# EAGLE board SensingREV2 (EAGLE 9.3.0)
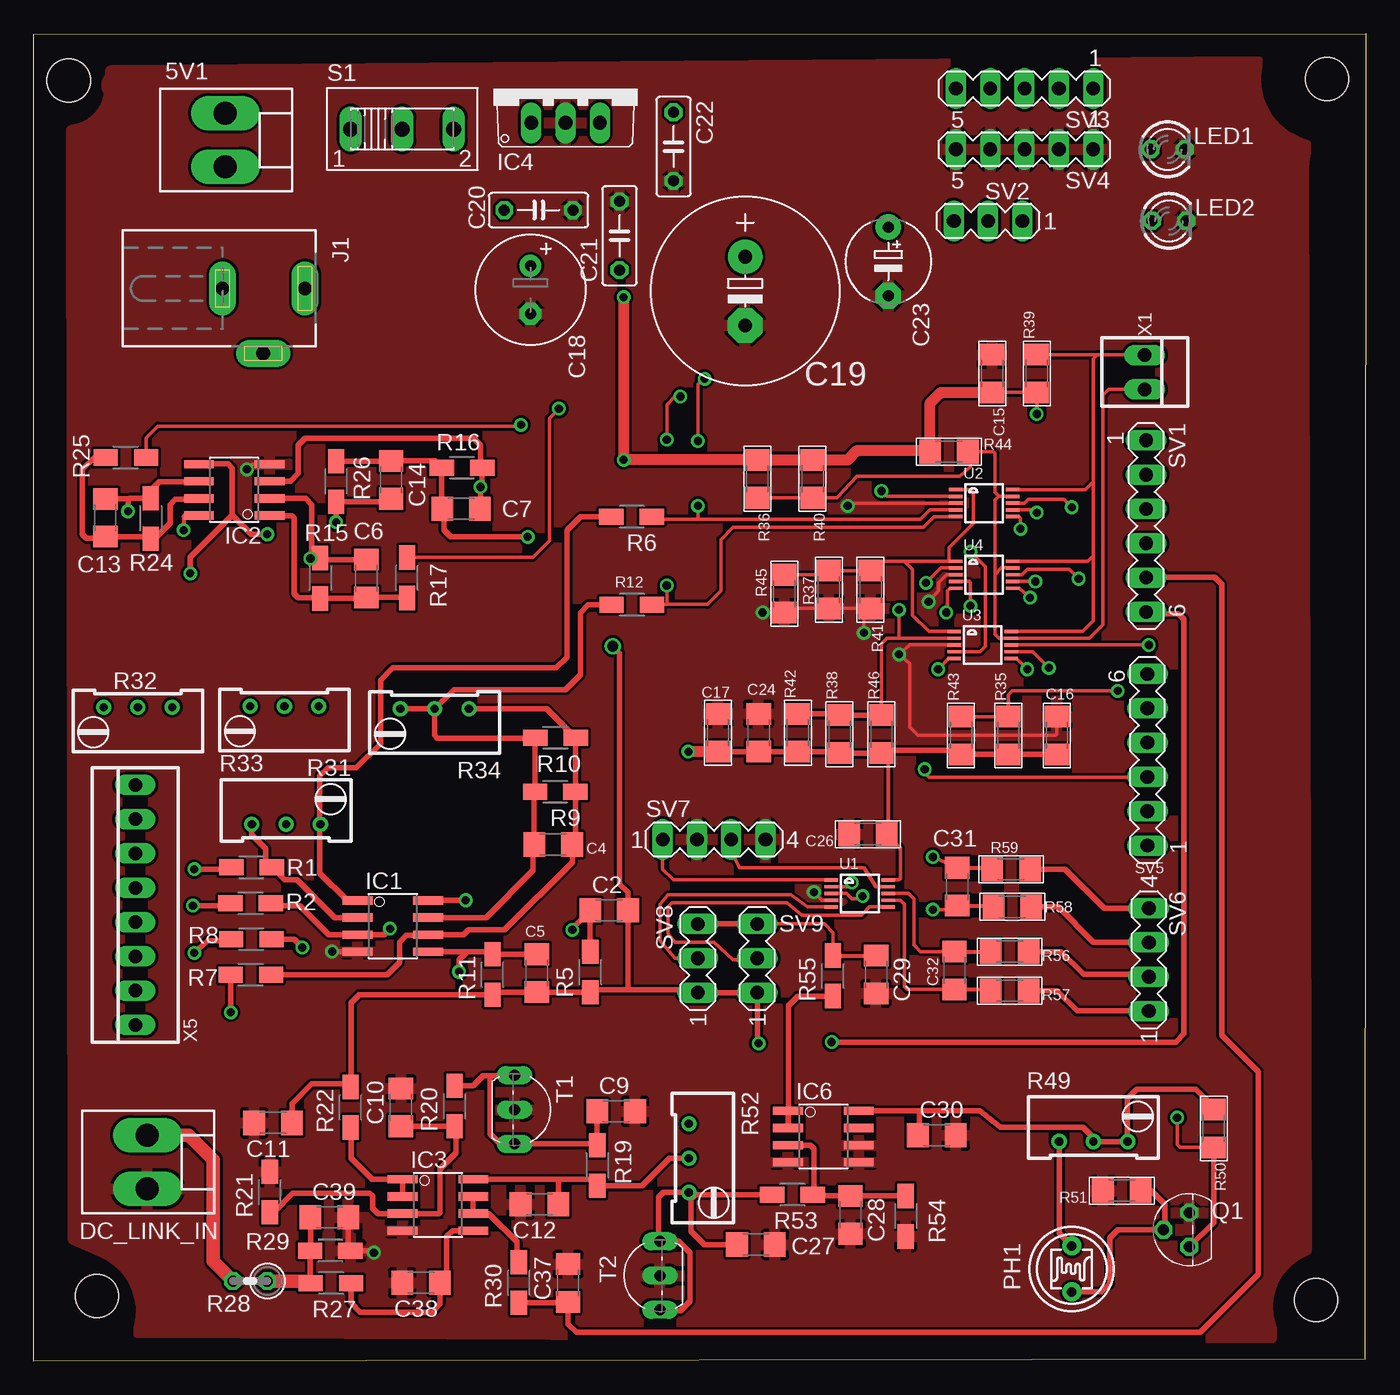
[diagram p0: board, top side]
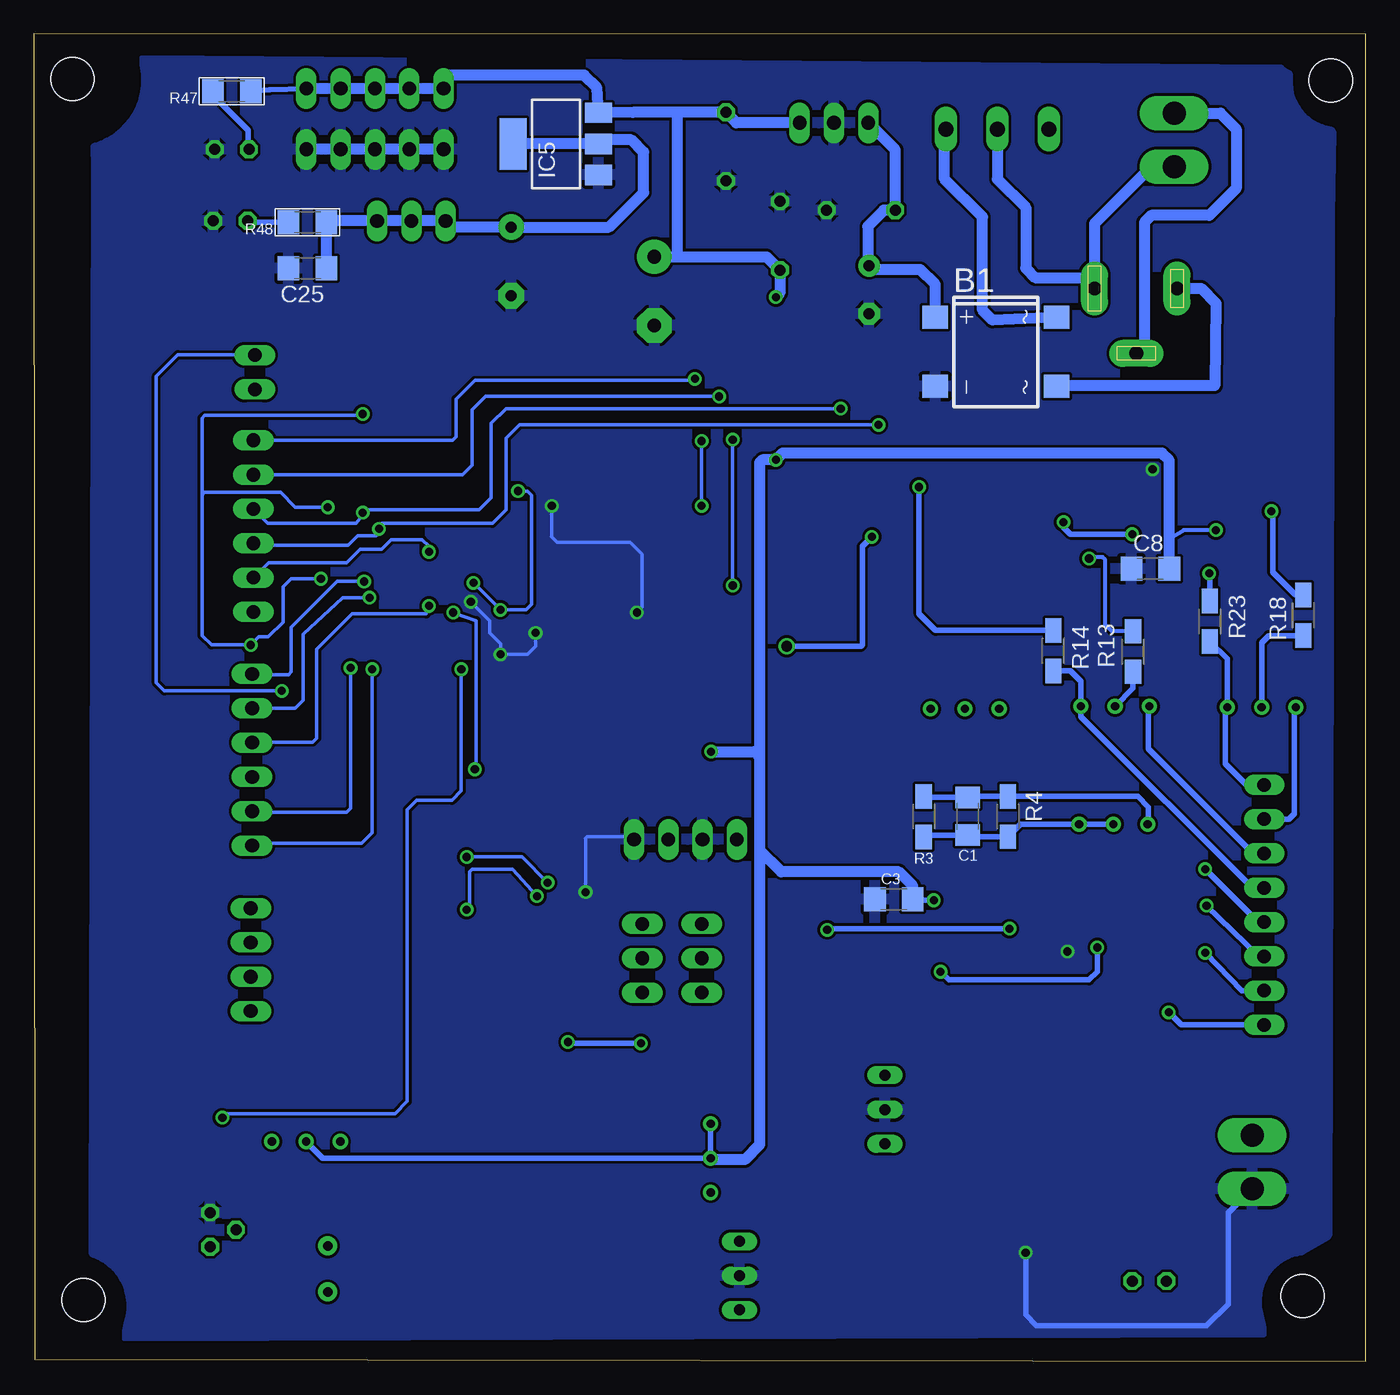
[diagram p1: board, bottom side, seen from below]

Size 98.66 x 98.29 mm. Coordinates in mm from the lower left corner, seen from the top.
Outline: 98.57,0.15 0.01,0 0,98.24 98.66,98.29 98.57,0.15
Copper layers (1*16): Top 0.025mm / dielectric 0.5mm / Bottom 0.025mm
Design rules "default *": minimum track width 8mil, minimum drill 15mil, track to track 8mil, track to pad 8mil, pad to pad 8mil, via to via 8mil, smd to smd 8mil, copper to edge 10mil, drill to drill 10mil, minimum pad ring 10mil, minimum via ring 8mil, stop-mask expansion 4mil, vias tented up to drill 0mil, thermal gap 10mil
Holes 3.2 mm at 2.59,94.83 94.99,4.53 95.79,94.93 4.69,4.83

## Footprints (pad centres in the part's own frame; a part is rotated, then mirrored left to right if it is on the bottom)
KK-156-2 = drill 1.7 pad 2.184 long: 1 -1.98,0; 2 1.98,0
DBS = smd 1.7 x 1.9: + -2.55,-4.5; - 2.55,-4.5; AC1 -2.55,4.5; AC2 2.55,4.5
C1206 = smd 1.6 x 1.8: 1 -1.4,0; 2 1.4,0
1206 = smd 1.6 x 1.8: 1 -1.4,0; 2 1.4,0
E3,5-8 = drill 0.813 pad 1.6: + -1.778,0 | drill 0.813 pad 1.6 octagon: - 1.778,0
E5-13 = drill 1.016 pad 2.54: + -2.54,0 | drill 1.016 pad 2.54 octagon: - 2.54,0
C050-025X075 = drill 0.813 octagon: 1 -2.54,0; 2 2.54,0
E5-6 = drill 0.813 pad 1.905: + -2.54,0 | drill 0.813 pad 1.905 octagon: - 2.54,0
SO08 = smd 0.61 x 2.21: 1 -1.905,-2.616; 2 -0.635,-2.616; 3 0.635,-2.616; 4 1.905,-2.616; 5 1.905,2.616; 6 0.635,2.616; 7 -0.635,2.616; 8 -1.905,2.616
TO220V = drill 1.016 long: 1 -2.54,-2.54; 2 0,-2.54; 3 2.54,-2.54
SOT-223 = smd 1.5 x 2: 1 -2.3,-3.15; 2 0,-3.15; 3 2.3,-3.15 | smd 3.8 x 2: 4 0,3.15
DCJ0202 = drill 1 pad 2 long: 1 0,3.1; 2 4.8,0; 3 0,-3
LED3MM = drill 0.813 octagon: A -1.27,0; K 1.27,0
T0-46-A10XX = drill 0.7 pad 1.4: 1 -1.7,0; 2 1.7,0
TO92 = drill 0.813 octagon: 1 1.27,0; 2 0,1.905; 3 -1.27,0
R1206W = smd 1.8 x 1.2: 1 -1.499,0; 2 1.499,0
0207/2V = drill 0.813 octagon: 1 -1.27,0; 2 1.27,0
RTRIM64W = drill 0.61: 1 1.27,-2.54; 2 1.27,0; 3 1.27,2.54
255SB = drill 1.118 long: 1 -3.81,0; 2 0,0; 3 3.81,0
MA06-1 = drill 1.016 long: 1 -6.35,0; 2 -3.81,0; 3 -1.27,0; 4 1.27,0; 5 3.81,0; 6 6.35,0
MA03-1 = drill 1.016 long: 1 -2.54,0; 2 0,0; 3 2.54,0
MA05-1 = drill 1.016 long: 1 -5.08,0; 2 -2.54,0; 3 0,0; 4 2.54,0; 5 5.08,0
MA04-1 = drill 1.016 long: 1 -3.81,0; 2 -1.27,0; 3 1.27,0; 4 3.81,0
TO92-ECB = drill 0.813 long: B 2.54,0; C 0,0; E -2.54,0
MSOP10 = smd 0.25 x 1: 1 -1,-2.113; 2 -0.5,-2.113; 3 0,-2.113; 4 0.5,-2.113; 5 1,-2.113; 6 1,2.113; 7 0.5,2.113; 8 0,2.113; 9 -0.5,2.113; 10 -1,2.113
22-23-2021 = drill 1 long: 1 -1.27,0; 2 1.27,0
22-23-2081 = drill 1 long: 1 -8.89,0; 2 -6.35,0; 3 -3.81,0; 4 -1.27,0; 5 1.27,0; 6 3.81,0; 7 6.35,0; 8 8.89,0

## Placement (x,y rotation side)
5V1  2PIN_RELIMATE  [KK-156-2]  14.19,90.43 270 top
B1  DBLS202G  [DBS]  27.39,74.73 270 bottom
C1  102  [C1206]  29.49,40.35 90 bottom
C2  102  [C1206]  42.62,33.38 0 top
C3  104  [C1206]  34.96,34.21 0 bottom
C4  102  [C1206]  38.47,38.26 0 top
C5  102  [C1206]  37.27,28.73 270 top
C6  102  [C1206]  24.64,57.96 270 top
C7  102  [C1206]  31.66,63.11 0 top
C8  104  [C1206]  15.95,58.68 0 bottom
C9  102  [C1206]  43.14,18.51 0 top
C10  102  [C1206]  27.19,18.8 90 top
C11  105  [C1206]  17.73,17.64 180 top
C12  104  [C1206]  37.46,11.62 180 top
C13  102  [C1206]  5.3,62.45 270 top
C14  102  [C1206]  26.47,65.25 270 top
C15  0.1µF  [1206]  70.99,73.13 270 top
C16  0.1uF  [1206]  75.79,46.33 270 top
C17  0.1µF  [1206]  50.69,46.53 270 top
C18  100uF/50V  [E3,5-8]  36.79,79.33 270 top
C19  1000uF/25V  [E5-13]  52.69,79.23 270 top
C20  0.1uF  [C050-025X075]  37.39,85.23 0 top
C21  0.1uF  [C050-025X075]  43.39,83.33 90 top
C22  0.1uF  [C050-025X075]  47.39,89.93 270 top
C23  22uf/25V Tantalum  [E5-6]  63.29,81.43 270 top
C24  0.1uF  [C1206]  53.69,46.53 90 top
C25  0.1uF  [C1206]  78.39,80.93 180 bottom
C26  0.1µF  [1206]  61.79,39.03 180 top
C27  102  [C1206]  53.49,8.63 0 top
C28  102  [C1206]  60.49,10.83 270 top
C29  105  [C1206]  62.39,28.63 270 top
C30  104  [C1206]  66.89,16.73 0 top
C31  102  [C1206]  68.39,35.13 270 top
C32  102  [C1206]  68.19,28.93 270 top
C37  105  [C1206]  39.58,5.79 90 top
C38  105  [C1206]  28.69,5.8 180 top
C39  105  [C1206]  21.9,10.65 0 top
DC_LINK_IN  2PIN_RELIMATE  [KK-156-2]  8.42,14.75 270 top
IC1  OPA2340U  [SO08]  26.6,32.21 270 top
IC2  OPA2340U  [SO08]  14.85,64.52 90 top
IC3  OPA2340U  [SO08]  29.94,11.56 270 top
IC4  7805TV  [TO220V]  39.39,94.23 0 top
IC5  AP1117  [SOT-223]  59.99,90.13 90 bottom
IC6  OPA2340U  [SO08]  58.49,16.63 270 top
J1  DCJ0202  [DCJ0202]  16.99,79.43 270 top
LED1  Red  [LED3MM]  83.99,89.73 0 top
LED2  Red  [LED3MM]  84.09,84.43 0 top
PH1  A1050_09  [T0-46-A10XX]  76.89,6.83 270 top
Q1  BC547  [TO92]  85.59,9.73 90 top
R1  1k  [R1206W]  16.13,36.57 0 top
R2  1k  [R1206W]  16.07,33.91 0 top
R3  20k  [R1206W]  32.74,40.32 270 bottom
R4  20k  [R1206W]  26.51,40.32 270 bottom
R5  10K  [R1206W]  41.22,28.82 90 top
R6  100E  [R1206W]  44.29,62.52 180 top
R7  1k  [R1206W]  16.09,28.62 0 top
R8  1k  [R1206W]  16.13,31.25 0 top
R9  20k  [R1206W]  38.63,42.15 180 top
R10  20k  [R1206W]  38.64,46.15 180 top
R11  10K  [R1206W]  33.98,28.63 90 top
R12  100E  [R1206W]  44.3,56.01 180 top
R13  1k  [R1206W]  17.23,52.55 90 bottom
R14  1k  [R1206W]  23.15,52.6 90 bottom
R15  1k  [R1206W]  21.22,57.97 270 top
R16  1k  [R1206W]  31.72,66.16 0 top
R17  1k  [R1206W]  27.65,58.01 90 top
R18  1k  [R1206W]  4.62,55.24 90 bottom
R19  510E  [R1206W]  41.74,14.49 270 top
R20  10k  [R1206W]  31.18,18.89 90 top
R21  22k  [R1206W]  17.49,12.53 90 top
R22  10E  [R1206W]  23.46,18.8 90 top
R23  1k  [R1206W]  11.54,54.78 90 bottom
R24  1k  [R1206W]  8.67,62.39 270 top
R25  1k  [R1206W]  6.83,66.91 0 top
R26  1k  [R1206W]  22.39,65.13 270 top
R27  10k  [R1206W]  22.01,5.77 180 top
R28  43K_1/2W  [0207/2V]  16.03,5.93 180 top
R29  1k  [R1206W]  21.96,8.18 180 top
R30  10E  [R1206W]  35.94,5.82 90 top
R31  100K  [RTRIM64W]  18.56,47.22 90 top
R32  100K  [RTRIM64W]  7.71,47.15 90 top
R33  100K  [RTRIM64W]  18.69,41.03 270 top
R34  100K  [RTRIM64W]  29.69,47.03 90 top
R35  10K  [1206]  72.19,46.33 90 top
R36  10K  [1206]  53.59,65.33 270 top
R37  10K  [1206]  58.89,57.13 270 top
R38  10K  [1206]  59.69,46.43 90 top
R39  10K  [1206]  74.29,73.13 90 top
R40  10K  [1206]  57.69,65.33 270 top
R41  10K  [1206]  61.99,57.13 270 top
R42  10K  [1206]  56.59,46.53 90 top
R43  10K  [1206]  68.69,46.33 90 top
R44  10K  [1206]  67.79,67.33 0 top
R45  10K  [1206]  55.59,56.83 270 top
R46  10K  [1206]  62.79,46.43 90 top
R47  390E  [1206]  83.99,94.03 180 bottom
R48  390E  [1206]  78.39,84.33 180 bottom
R49  100K  [RTRIM64W]  78.49,17.53 270 top
R50  1K  [1206]  87.39,17.23 270 top
R51  1K  [1206]  80.59,12.63 180 top
R52  100K  [RTRIM64W]  49.79,15.03 180 top
R53  10k  [R1206W]  56.19,12.33 180 top
R54  22k  [R1206W]  64.59,10.73 270 top
R55  10E  [R1206W]  59.19,28.53 90 top
R56  <10E  [1206]  72.29,30.33 180 top
R57  <10E  [1206]  72.29,27.43 180 top
R58  <10E  [1206]  72.49,33.63 180 top
R59  <10E  [1206]  72.39,36.43 180 top
S1  Slide_SW  [255SB]  27.29,91.23 0 top
SV1  Signal_TP  [MA06-1]  82.39,61.83 270 top
SV2  3.3V_PWR  [MA03-1]  70.69,84.43 180 top
SV3  5V_PWR  [MA05-1]  73.39,94.23 180 top
SV4  GND  [MA05-1]  73.39,89.73 180 top
SV5  ADC_IN  [MA06-1]  82.49,44.53 90 top
SV6  INA2181_IN  [MA04-1]  82.59,29.73 90 top
SV7  INA2181_OUT  [MA04-1]  50.39,38.63 0 top
SV8  REF_JMPR1  [MA03-1]  49.19,29.83 90 top
SV9  REF_JMPR2  [MA03-1]  53.59,29.83 90 top
T1  TL431  [TO92-ECB]  35.62,18.63 270 top
T2  TL431  [TO92-ECB]  46.39,6.33 90 top
U1  INA2181A2  [MSOP10]  61.19,34.63 270 top
U2  ADS1115IDGST  [MSOP10]  70.39,63.53 270 top
U3  ADS1115IDGST  [MSOP10]  70.29,53.03 270 top
U4  ADS1115IDGST  [MSOP10]  70.39,58.23 270 top
X1  22-23-2021  [22-23-2021]  82.29,73.23 270 top
X5  IN_SIGNAL  [22-23-2081]  7.52,33.78 90 top

## Library data of the parts
5V1 DC_LINK_IN = con-molex; OC_FARNELL: unknown; OC_NEWARK: unknown
B1 = rectifier
C1-C14 C18-C25 C27-C32 C37-C39 R1-R34 R49 R52-R55 = rcl
C15-C17 C26 R35-R48 R50 R51 R56-R59 U1-U4 = microbuilder
IC1-IC3 IC6 = burr-brown; MF: TEXAS INSTRUMENTS; MPN: OPA2340UA; OC_FARNELL: 1101541; OC_NEWARK: 36K7581
IC4 = linear
IC5 = AWJLEagleLib
J1 = con-jack; OC_FARNELL: unknown; OC_NEWARK: unknown
LED1 LED2 = led
PH1 = photo-elements
Q1 = transistor-npn
S1 = switch
SV1-SV9 = con-lstb; OC_FARNELL: unknown; OC_NEWARK: unknown
T1 T2 = transistor-neu-to92
X1 = con-molex; MF: MOLEX; MPN: 22-23-2021; OC_FARNELL: 1462926; OC_NEWARK: 25C3832
X5 = con-molex; MF: MOLEX; MPN: 22-23-2081; OC_FARNELL: 1756826; OC_NEWARK: 01C7592

## Nets
1.7V: C2.2 C5.2 C7.1 C11.1 C14.1 R5.1 R11.1 R16.1 R22.2 R26.1 SV1.6 SV8.1 SV9.1
+3V3: C23.+ C25.1 IC5.2 IC5.4 R48.1 SV2.1 SV2.2 SV2.3
+5V: C3.2 C8.2 C12.1 C15.2 C16.2 C17.2 C19.+ C21.1 C22.1 C24.1 C26.1 C30.1 IC1.8 IC2.8 IC3.8 IC4.3 IC5.3 IC6.8 R19.2 R35.1 R36.1 R38.1 R39.1 R40.1 R42.1 R43.1 R44.1 R46.1 R47.1 R49.2 R49.3 R50.1 R52.1 R52.2 SV3.1 SV3.2 SV3.3 SV3.4 SV3.5 U1.10 U2.8 U3.8 U4.8
ADDR: R37.1 R41.1 R45.1 U2.1 U3.1 U4.1
AIN6: SV5.1 U3.6
AIN7: SV5.2 U3.7
AIN8: SV5.4 U4.4
AIN9: SV5.3 U4.5
AIN10: SV5.5 U4.6
AIN11: SV5.6 U4.7
ALERT: R38.2 R42.2 R46.2 U2.2 U3.2 U4.2
DC_LINK_SENSE: C37.1 R30.1 SV1.5 U3.4
GND: B1.- C3.1 C8.1 C9.2 C10.2 C11.2 C12.2 C15.1 C16.1 C17.1 C18.- C19.- C20.2 C21.2 C22.2 C23.- C24.2 C25.2 C26.2 C27.2 C28.2 C29.2 C30.2 C37.2 C38.2 C39.2 DC_LINK_IN.2 IC1.4 IC2.4 IC3.4 IC4.2 IC5.1 IC6.4 IC6.5 IC6.6 LED1.K LED2.K Q1.1 R21.2 R29.1 R37.2 R41.2 R45.2 R51.2 R54.2 SV4.1 SV4.2 SV4.3 SV4.4 SV4.5 SV7.2 SV7.4 T1.C T2.C U1.4 U2.3 U3.3 U4.3
IN+1: C31.2 R58.2 U1.3
IN+2: C32.2 R57.2 U1.7
IN-1: C31.1 R59.2 U1.2
IN-2: C32.1 R56.2 U1.8
IN_CUR1: R1.1 X5.4
IN_CUR2: R2.1 X5.3
IN_CURRENT_SENSE: R6.1 SV1.1 U2.4
IN_VLT1: R31.3 X5.6
IN_VLT2: R14.1 R31.1 X5.5
IN_VOLTAGE_SENSE: R17.2 SV1.3 U2.7
LDR1: Q1.3 R50.2 U3.5
N$1: C1.2 IC1.2 R1.2 R3.1 R4.1 R33.1
N$2: B1.+ C18.+ C20.1 IC4.1
N$3: C1.1 IC1.1 R3.2 R4.2 R6.2 R33.2 R33.3
N$4: C2.1 IC1.3 R2.2 R5.2
N$5: C5.1 IC1.5 R8.2 R11.2
N$6: C39.1 R27.2 R28.1 R29.2
N$7: C4.2 IC1.6 R7.2 R9.1 R10.1 R34.1
N$8: C4.1 IC1.7 R9.2 R10.2 R12.2 R34.2 R34.3
N$9: DC_LINK_IN.1 R28.2
N$10: C10.1 IC3.3 R20.1 R21.1
N$11: R13.1 R31.2
N$12: C9.1 R19.1 R20.2 T1.B T1.E
N$13: C6.1 IC2.2 R13.2 R15.1
N$14: IC3.1 IC3.2 R22.1
N$15: C7.2 IC2.3 R14.2 R16.2
N$16: R18.1 R32.2
N$17: C6.2 IC2.1 R15.2 R17.1
N$18: C38.1 IC3.5 R27.1
N$19: IC3.6 IC3.7 R30.2
N$20: LED1.A R47.2
N$21: C13.1 IC2.6 R18.2 R24.1
N$22: C14.2 IC2.5 R23.2 R26.2
N$23: C13.2 IC2.7 R24.2 R25.1
N$24: LED2.A R48.2
N$25: 5V1.2 J1.1 S1.2
N$26: 5V1.1 J1.2
N$27: B1.AC2 J1.3
N$28: B1.AC1 S1.3
N$29: C28.1 IC6.3 R53.1 R54.1
N$30: PH1.1 R49.1
N$31: PH1.2 Q1.2 R51.1
N$32: C27.1 R52.3 R53.2 T2.B T2.E
N$33: IC6.1 IC6.2 R55.1
N$34: R59.1 SV6.4
N$35: R58.1 SV6.3
N$36: R56.1 SV6.2
N$37: R57.1 SV6.1
OUT1: SV7.1 U1.1
OUT2: SV7.3 U1.9
OUT_CUR1: R7.1 X5.1
OUT_CUR2: R8.1 X5.2
OUT_CURRENT_SENSE: R12.1 SV1.2 U2.5
OUT_VLT1: R32.3 X5.7
OUT_VLT2: R23.1 R32.1 X5.8
OUT_VOLTAGE_SENSE: R25.2 SV1.4 U2.6
REF1: SV8.2 U1.5
REF2: SV9.2 U1.6
SCL: R35.2 R39.2 R43.2 U2.10 U3.10 U4.10 X1.1
SDA: R36.2 R40.2 R44.2 U2.9 U3.9 U4.9 X1.2
VER_REF: C29.1 R55.2 SV8.3 SV9.3

## Tracks (layer width: path | path; a pad name or v marks a point on that pad's centre or on a via)
1.7V  (via drill 0.6, 0.8 pad 0.25)
  Top 0.406: C11.1 19.13,19.07 20.59,20.53 23.23,20.53 R22.2 23.49,20.33 23.49,26.53 24.1,27.13 R11.1 34.17,27.33 C5.2 37.28,27.32 R5.1 41.41,27.5 43.99,27.5 | R26.1 26.45,66.63 C14.1 29.73,66.66 R16.1 30.22,63.15 C7.1 30.39,62.98 30.39,61.53 30.89,61.03 v36.59,61.03 | 43.99,27.5 48.98,27.5 SV8.1 SV9.1 53.59,23.63 v53.69,23.53 | 43.99,27.5 44.02,27.53 C2.2 44.02,34.7 43.39,35.33 43.39,52.43 v42.89,52.93 | v59.09,23.63 84.59,23.63 85.19,24.23 85.19,54.93 84.79,55.33 82.54,55.33 SV1.6
  Bottom 0.406: v53.69,23.53 58.99,23.53 v59.09,23.63 | v42.89,52.93 37.39,52.93 37.29,53.03 37.29,60.33 v36.59,61.03
+3V3
  Bottom 0.813: SV2.2 SV2.3 67.69,83.97 C23.+ 56.05,83.97 53.49,86.53 53.49,89.53 54.39,90.43 56.74,90.43 IC5.2 IC5.4 | SV2.2 70.89,84.43 71.09,84.63 70.89,84.63 SV2.2 | SV2.2 SV2.1 76.89,84.43 R48.1 C25.1
+5V  (via drill 0.6, 0.6 pad 0.25)
  Top 0.254: C15.2 R39.1 v74.29,70.13 | U1.10 64.09,35.63 64.19,35.73 64.19,38.03 C26.1 | U3.8 v82.59,53.03 | U4.8 73.19,58.23 73.59,58.63 76.69,58.63 v77.39,57.93 | U2.8 73.39,63.53 73.69,63.83 76.29,63.83 v76.89,63.23
  Top 0.305: C26.1 63.29,38.93 63.29,44.53 R46.1 | IC2.8 11.17,62.61 11.09,62.53 v11.09,61.53
  Top 0.406: IC1.8 31.98,34.12 v31.99,34.13 | R46.1 R38.1 59.59,45.13 R42.1 C24.1 C17.2 | 63.29,44.53 63.29,45.03 63.49,45.23 68.39,45.23 R43.1 R35.1 C16.2 | R52.2 47.09,15.03 45.05,12.99 R19.2 41.26,13.47 38.89,13.47 | IC3.8 38.89,13.47 | C12.1 38.86,13.43 38.89,13.47 | 65.59,18.53 70.09,18.53 71.59,17.33 77.69,17.33 78.49,16.53 R49.2 R49.3 80.99,16.3 80.99,19.43 81.69,20.13 86.09,20.13 87.39,18.83 R50.1 | 65.59,18.53 65.59,16.83 C30.1 | IC6.8 65.59,18.54 65.59,18.53
  Top 0.813: C15.2 67.19,71.73 66.39,70.93 R44.1 66.29,67.43 60.99,67.43 60.29,66.73 R40.1 R36.1 v43.69,66.73 v43.69,78.79 | C17.2 v48.49,45.13
  Bottom 0.254: 86.19,64.13 86.19,53.73 85.49,53.03 v82.59,53.03 81.99,53.63 81.29,53.63 80.19,54.73 80.19,57.33 79.59,57.93 v77.39,57.93 | 86.19,64.13 86.19,69.83 85.99,70.03 74.39,70.03 v74.29,70.13 | v76.89,63.23 79.29,63.23 80.39,64.33 85.99,64.33 86.19,64.13
  Bottom 0.305: v11.09,61.53 13.49,61.53 14.49,60.93 14.49,58.73 C8.2
  Bottom 0.406: SV3.1 81.19,94.13 R47.1 | v31.99,34.13 33.48,34.13 C3.2 | R49.2 77.26,15.03 R52.2 R52.1
  Bottom 0.813: SV3.1 SV3.2 SV3.3 SV3.4 SV3.5 68.01,95.23 57.89,95.23 56.94,94.28 IC5.3 54.28,92.47 50.99,92.47 | IC4.3 46.61,91.69 C22.1 50.99,92.47 | C19.+ 50.99,81.77 | 50.99,81.77 50.99,92.47 | C8.2 14.55,66.69 15.09,67.23 43.19,67.23 v43.69,66.73 44.69,66.73 44.89,66.53 44.89,44.73 | 44.89,44.73 44.89,37.83 | 44.89,37.83 44.89,16.03 45.99,14.93 48.42,14.93 R52.2 | C3.2 33.56,35.2 34.59,36.23 43.29,36.23 44.89,37.83 | v48.49,45.13 45.29,45.13 44.89,44.73 | v43.69,78.79 43.39,79.09 C21.1 44.37,81.77 50.99,81.77
ADDR
  Top 0.254: R45.1 58.59,58.23 R37.1 R41.1 62.69,59.23 64.49,59.23 | U4.1 67.79,59.23 | 67.79,59.23 64.49,59.23 | U2.1 69.39,64.53 69.59,64.33 69.59,62.03 67.79,60.23 67.79,59.23 | U3.1 66.29,54.03 65.09,55.23 65.09,58.63 64.49,59.23
AIN6  (via drill 0.6)
  Top 0.254: U3.6 72.79,52.03 v73.59,51.23
  Bottom 0.254: v73.59,51.23 73.59,39.13 74.39,38.33 82.34,38.33 SV5.1
AIN7  (via drill 0.6)
  Top 0.254: U3.7 73.99,52.53 v75.19,51.33
  Bottom 0.254: v75.19,51.33 75.19,40.93 75.49,40.63 82.4,40.63 SV5.2
AIN8  (via drill 0.6)
  Top 0.254: U4.4 69.29,57.73 69.39,57.63 v69.39,55.93
  Bottom 0.254: SV5.4 82.46,45.83 77.99,45.83 77.69,46.13 77.69,52.73 75.09,55.33 69.59,55.33 69.39,55.63 v69.39,55.93
AIN9  (via drill 0.6)
  Top 0.254: U4.5 67.89,57.23 67.69,57.03 67.69,55.53 v67.59,55.43 | v65.99,43.83 65.99,43.53 66.29,43.23 82.46,43.23 SV5.3
  Bottom 0.254: v67.59,55.43 65.89,54.83 65.89,43.93 v65.99,43.83
AIN10  (via drill 0.6)
  Top 0.254: U4.6 72.99,57.23 v73.79,56.53
  Bottom 0.254: v73.79,56.53 75.79,56.53 78.69,53.83 78.69,48.93 79.29,48.33 SV5.5
AIN11  (via drill 0.6)
  Top 0.254: U4.7 v74.19,57.73
  Bottom 0.254: v74.19,57.73 76.19,57.73 79.59,54.33 79.59,51.03 79.79,50.83 82.44,50.83 SV5.6
ALERT  (via drill 0.6, 0.6 pad 0.25)
  Top 0.254: U3.2 64.09,53.53 | 64.09,53.53 63.19,53.53 62.79,53.13 62.79,48.43 62.19,47.83 | U4.2 67.19,58.73 v66.09,57.63 | v64.09,55.63 64.09,53.53 | U2.2 63.19,64.03 v62.79,64.43
  Top 0.406: R42.2 59.59,47.93 R38.2 62.19,47.83 R46.2 | R46.2 63.19,47.83 63.29,47.73 62.89,47.73 R46.2
  Bottom 0.254: v66.09,57.63 v64.09,55.63 62.19,55.63 61.79,56.03 61.79,64.13 62.09,64.43 v62.79,64.43
DC_LINK_SENSE  (via drill 0.6)
  Top 0.254: U3.4 70.09,52.53 70.49,52.93 70.49,58.83 v69.39,59.93
  Top 0.406: R30.1 39.51,4.32 C37.1 39.58,2.74 40.19,2.13 86.39,2.13 90.69,6.43 90.69,21.43 87.99,24.13 87.99,57.53 87.49,58.03 SV1.5
  Bottom 0.254: v69.39,59.93 69.39,60.33 69.89,60.83 72.19,60.83 72.89,60.13 74.49,60.13 75.49,59.13 81.28,59.13 SV1.5
GND  (via drill 0.6, 0.6 pad 0.25)
  Top 0.254: U1.4 58.39,34.13 v57.79,34.73 | U2.3 60.39,63.53 v60.29,63.33 | v53.99,55.43 55.09,55.43 | 55.09,55.43 R45.2 | 55.09,55.43 55.39,55.73 R37.2 R41.2 61.49,55.23 v61.49,53.93 | U3.3 64.89,53.03 v64.09,52.33 64.89,51.63 64.89,46.93 65.49,46.33 75.69,46.33 75.79,46.43 C16.1 | U4.3 67.59,58.23 66.99,57.63 66.99,57.03 v66.29,56.23 | IC2.4 16.18,66.42 v15.79,66.03
  Top 0.406: v25.19,8.03 25.04,8.18 R29.1 23.3,8.34 C39.2 | IC1.4 22.12,30.31 v22.09,30.33
  Bottom 0.254: v57.79,34.73 57.79,38.73 57.69,38.83 54.4,38.83 SV7.4 | v60.29,63.33 60.29,61.03 59.89,60.63 54.49,60.63 53.59,59.73 53.59,55.83 v53.99,55.43 | v61.49,53.93 61.49,52.93 62.09,52.33 v64.09,52.33 64.09,53.13 64.89,53.93 64.89,54.83 v66.29,56.23
  Bottom 0.406: v25.19,8.03 25.19,3.43 24.39,2.63 11.79,2.63 10.19,4.23 10.19,10.99 DC_LINK_IN.2 | v22.09,30.33 21.99,30.33
  Bottom 0.813: SV4.5 SV4.4 SV4.3 SV4.2 SV4.1
  pour Bottom: 2.69,84.83 2.89,9.33 4.79,8.23 arc-90 8.09,3.93 7.69,2.13 91.79,1.83 91.59,2.73 arc-90 94.19,8.03 93.99,89.03 94.09,89.83 arc-90 90.49,96.33 6.39,95.63 5.79,95.23 arc-90 2.59,91.03
  pour Top: 5.69,95.03 5.49,94.13 arc-90
  pour Top: 2.79,91.13 arc90 2.79,90.83 2.89,9.03 4.69,8.23 arc-90 7.69,2.13 91.69,1.73 91.69,2.43 arc-90 94.29,8.23 94.09,88.63 94.29,90.03 arc-90 90.69,96.23 5.69,95.53 5.59,94.63 arc-90
IN+1  (via drill 0.6, 0.6 pad 0.25)
  Top 0.254: v66.59,33.43 68.09,33.43 C31.2 | U1.3 60.19,34.63 60.59,34.23 61.19,34.23 v61.39,34.43
  Top 0.305: C31.2 70.99,33.73 R58.2
  Bottom 0.254: v61.39,34.43 63.19,36.43 66.19,36.43 66.39,36.23 66.39,33.83 v66.59,33.43
IN+2
  Top 0.254: U1.7 64.19,34.13 64.49,33.83 64.49,27.73 64.69,27.53 C32.2
  Top 0.305: C32.2 70.79,27.53 R57.2
IN-1  (via drill 0.6 pad 0.25)
  Top 0.254: U1.2 60.29,35.13 v60.59,35.43 | v66.59,37.33 C31.1
  Top 0.305: C31.1 70.89,36.53 R59.2
  Bottom 0.254: v60.59,35.43 62.49,37.33 v66.59,37.33
IN-2
  Top 0.254: U1.8 64.79,34.63 65.19,34.23 65.19,30.83 65.69,30.33 C32.1
  Top 0.305: C32.1 R56.2
IN_CUR1  (via drill 0.6)
  Top 0.406: v11.89,36.43 14.5,36.43 R1.1
  Bottom 0.406: X5.4 7.97,32.51 v11.89,36.43
IN_CUR2  (via drill 0.6)
  Top 0.406: v11.79,33.73 14.39,33.73 R2.1
  Bottom 0.406: X5.3 7.93,29.97 v11.79,33.73
IN_CURRENT_SENSE  (via drill 0.6)
  Top 0.254: U2.4 66.39,63.03 65.69,62.33 49.19,62.33 | 49.19,62.33 45.98,62.33 R6.1 | v49.69,72.73 49.59,72.73 49.19,72.33 v49.19,68.13 | v49.19,63.33 49.19,62.33
  Bottom 0.254: SV1.1 67.64,68.18 67.39,68.43 67.39,71.23 65.99,72.63 49.79,72.63 v49.69,72.73 | v49.19,68.13 v49.19,63.33
IN_VLT1
  Bottom 0.406: X5.6 8.35,37.59 16.09,45.33 16.09,48.42 R31.3
IN_VLT2
  Bottom 0.406: X5.5 8.41,35.05 21.09,47.73 21.09,48.48 R31.1 21.1,50.34 21.89,51.13 23.12,51.13 R14.1
IN_VOLTAGE_SENSE  (via drill 0.6, 0.6 pad 0.25)
  Top 0.254: U2.7 73.89,63.03 v74.29,62.83 | R17.2 36.97,59.51 38.19,60.73 38.19,69.83 v38.89,70.53
  Bottom 0.254: SV1.3 81.32,62.03 74.79,62.03 74.49,62.43 v74.29,62.83 74.09,63.03 65.69,63.03 64.79,63.93 64.79,69.43 63.69,70.53 v38.89,70.53
LDR1  (via drill 0.6)
  Top 0.254: U3.5 67.79,52.03 v66.99,51.23 | v84.69,18.03 84.69,16.03 84.89,15.83 R50.2
  Top 0.406: R50.2 87.39,10.26 Q1.3
  Bottom 0.254: v66.99,51.23 66.99,42.23 67.69,41.53 70.29,41.53 70.99,40.83 70.99,19.23 71.89,18.33 84.39,18.33 v84.69,18.03
N$1
  Top 0.406: R33.1 16.15,38.97 17.19,37.93 17.19,37.01 R1.2 18.57,35.63 19.49,35.63 22.28,32.85 IC1.2
  Bottom 0.406: R33.1 16.09,39.82 16.09,41.03 16.88,41.82 R4.1 29.42,41.82 C1.2 32.67,41.75 R3.1
N$2
  Bottom 0.813: B1.+ 31.89,79.73 32.99,80.83 36.51,80.83 C18.+ 36.89,81.21 36.89,84.03 35.69,85.23 C20.1 34.85,89.69 IC4.1
N$3
  Top 0.406: IC1.1 23.21,34.12 21.19,36.13 21.19,39.72 R33.3 21.19,39.8 21.19,43.33 21.79,43.93 23.89,43.93 25.69,45.73 25.69,50.43 26.59,51.33 38.69,51.33 39.49,52.13 39.49,61.53 40.48,62.52 R6.2
  Bottom 0.406: R33.2 R33.3 25.57,39.76 R4.2 29.37,38.82 C1.1 32.61,38.95 R3.2
N$4  (via drill 0.6)
  Top 0.406: R2.2 17.75,33.73 19.69,33.73 21.85,31.58 IC1.3 25.94,31.58 v26.39,32.03 | R5.2 C2.1 39.89,32.05 v39.89,31.93
  Bottom 0.406: v26.39,32.03 39.79,32.03 v39.89,31.93
N$5  (via drill 0.6)
  Top 0.406: IC1.5 32.09,30.31 | 32.09,30.31 33.8,30.31 R11.2 C5.1 | R8.2 19.27,31.25 v19.89,30.63 | v31.49,28.83 31.49,29.71 32.09,30.31
  Bottom 0.406: v19.89,30.63 19.89,28.83 20.49,28.23 30.89,28.23 v31.49,28.83
N$6
  Top 0.406: C39.1 20.5,8.22 R29.2 20.47,5.81 R27.2
  Top 1.016: R28.1 20.35,5.93 R27.2
N$7
  Top 0.406: R7.2 26.18,28.62 27.09,29.53 27.09,31.03 27.59,31.53 29.17,31.53 IC1.6 31.84,31.58 32.19,31.93 34.89,31.93 39.89,36.93 39.89,38.24 C4.2 40.12,38.51 R9.1 40.14,42.17 R10.1 38,48.3 R34.1
N$8
  Top 0.406: IC1.7 33.51,32.85 36.99,36.33 36.99,38.18 C4.1 37.07,42.1 R9.2 37.14,42.17 R10.2 37.12,46.13 29.89,46.13 29.69,46.33 R34.2 | R34.3 R34.2 | R12.2 41.07,56.01 40.49,55.43 40.49,50.83 39.39,49.73 31.12,49.73 R34.2
N$9
  Top 1.016: DC_LINK_IN.1 11.49,16.73 13.29,14.93 13.29,7.4 R28.2
N$10
  Top 0.406: R21.1 17.79,11.03 19.19,12.43 24.89,12.43 25.09,12.23 25.09,11.33 25.49,10.93 IC3.3 29.99,10.93 30.09,11.03 30.09,14.23 31.29,15.43 31.29,17.28 R20.1 C10.1
N$11
  Bottom 0.406: R13.1 17.23,49.82 R31.2
N$12
  Top 0.406: C9.1 R19.1 41.64,16.09 T1.B 34.53,16.09 33.79,16.83 33.79,21.03 33.89,21.13 | R20.2 32.56,20.39 33.29,21.13 33.89,21.13 | 33.89,21.13 35.58,21.13 T1.E
N$13  (via drill 0.6 pad 0.25)
  Top 0.305: v20.49,59.43 21.18,59.43 R15.1
  Top 0.406: IC2.2 20.14,63.88 20.59,63.43 20.59,60.1 R15.1 21.33,59.36 C6.1
  Bottom 0.305: R13.2 18.81,54.05 19.29,54.53 19.29,59.33 19.49,59.53 20.39,59.53 v20.49,59.43
N$14
  Top 0.406: R22.1 23.49,17.27 23.49,15.03 25.06,13.47 IC3.1 IC3.2
N$15  (via drill 0.6 pad 0.25)
  Top 0.406: IC2.3 19.01,65.15 19.59,65.73 19.59,67.83 20.09,68.33 32.59,68.33 33.09,67.83 33.09,66.29 R16.2 33.22,64.86 v33.09,64.73 33.09,63.15 C7.2
  Bottom 0.406: R14.2 31.86,54.1 33.09,55.33 v33.09,64.73
N$16
  Bottom 0.406: R32.2 7.71,53.21 7.19,53.73 R18.1
N$17
  Top 0.406: IC2.1 19.11,62.61 19.29,62.43 19.29,56.83 19.59,56.53 21.16,56.53 R15.2 24.55,56.47 C6.2 27.6,56.56 R17.1
N$18
  Top 0.406: R27.1 23.51,4.32 24.19,3.63 29.49,3.63 30.09,4.23 C38.1 30.59,6.3 30.59,9.23 31.02,9.66 IC3.5
N$19
  Top 0.406: IC3.7 IC3.6 33.7,10.93 35.79,8.83 35.79,7.46 R30.2
N$20
  Bottom 0.406: R47.2 85.39,93.73 82.79,91.13 82.79,89.8 LED1.A
N$21  (via drill 0.6)
  Top 0.406: IC2.6 12.22,65.13 9.29,65.13 8.67,64.5 R24.1 7.09,63.89 6.99,63.79 | v6.99,62.93 6.99,63.79 | 6.99,63.79 6.93,63.85 C13.1
  Bottom 0.406: R18.2 5.2,56.74 6.89,58.43 6.89,62.83 v6.99,62.93
N$22  (via drill 0.6, 0.6 pad 0.25)
  Top 0.406: v11.59,58.33 11.59,59.53 14.69,62.63 | 14.69,62.63 14.69,66.13 14.39,66.43 12.25,66.43 IC2.5 | C14.2 26.25,63.63 R26.2 v22.39,62.14 v22.39,62.13 | v17.29,61.23 16.09,61.23 14.69,62.63
  Bottom 0.406: R23.2 11.54,58.28 v11.59,58.33 | v22.39,62.13 22.39,61.73 21.89,61.23 v17.29,61.23
N$23
  Top 0.406: IC2.7 12.19,63.83 10.49,63.83 10.09,63.43 10.09,62.03 8.96,60.89 R24.2 8.51,61.05 C13.2 5.18,60.93 3.89,60.93 3.59,61.23 3.59,66.03 4.47,66.91 R25.1
N$24
  Bottom 0.406: R48.2 82.72,84.33 LED2.A
N$25
  Bottom 0.813: 5V1.2 15.87,88.45 20.09,84.23 J1.1 20.89,80.23 24.49,80.23 25.19,80.93 25.19,85.43 27.29,87.53 S1.2
N$26
  Bottom 0.813: 5V1.1 10.77,92.41 9.59,91.23 9.59,86.83 11.59,84.83 15.89,84.83 16.39,84.33 16.39,75.23 J1.2
N$27
  Bottom 0.813: J1.3 12.19,79.43 11.09,78.33 11.19,72.23 22.84,72.23 B1.AC2
N$28
  Bottom 0.813: B1.AC1 27.64,77.08 28.39,77.83 28.39,84.73 31.19,87.53 31.19,91.14 S1.3
N$29
  Top 0.406: R54.1 C28.1 57.69,12.23 R53.1 57.79,12.43 57.79,15.73 57.53,16 IC6.3
N$30
  Top 0.406: R49.1 75.95,9.47 PH1.1
N$31
  Top 0.406: R51.1 82.79,12.63 83.79,11.63 83.79,9.84 Q1.2 80.29,9.73 79.69,9.13 79.69,5.73 79.09,5.13 PH1.2
N$32
  Top 0.406: C27.1 49.69,8.63 48.69,9.63 48.69,12.03 | 48.69,12.03 48.69,12.32 R52.3 46.65,12.49 46.29,12.13 46.29,8.97 T2.B 47.75,8.87 48.59,8.03 48.59,4.43 47.89,3.73 46.45,3.73 T2.E | R53.2 48.99,12.33 48.69,12.03
N$33
  Top 0.406: IC6.1 IC6.2 55.89,17.28 55.89,26.33 56.59,27.03 R55.1
N$34
  Top 0.406: R59.1 76.39,36.43 79.29,33.53 SV6.4
N$35
  Top 0.406: R58.1 75.89,33.63 78.49,31.03 82.56,31.03 SV6.3
N$36
  Top 0.406: R56.1 76.09,30.33 77.79,28.63 82.42,28.63 SV6.2
N$37
  Top 0.406: R57.1 75.79,27.43 77.29,25.93 SV6.1
OUT1
  Top 0.254: U1.1 47.39,35.63 46.59,36.43 SV7.1
OUT2
  Top 0.254: U1.9 62.39,35.13 61.49,36.53 52.29,36.53 51.69,37.73 51.69,38.6 SV7.3
OUT_CUR1  (via drill 0.6)
  Top 0.406: v14.59,25.83 R7.1
  Bottom 0.406: X5.1 13.65,24.89 v14.59,25.83
OUT_CUR2  (via drill 0.6)
  Top 0.406: v11.89,30.23 12.89,31.13 14.51,31.13 R8.1
  Bottom 0.406: X5.2 9.19,27.43 v11.89,30.23
OUT_CURRENT_SENSE  (via drill 0.6, 0.6 pad 0.25)
  Top 0.254: U2.5 66.69,62.53 65.89,61.73 51.79,61.73 50.89,60.83 50.89,57.03 49.89,56.03 46.79,56.03 | 46.79,56.03 45.82,56.03 R12.1 | v47.89,71.43 47.49,71.43 46.89,70.83 v46.89,68.23 | v46.89,57.43 46.89,56.13 46.79,56.03
  Bottom 0.254: SV1.2 66.88,65.64 66.19,66.33 66.19,70.43 65.19,71.43 v47.89,71.43 | v46.89,68.23 v46.89,57.43
OUT_VLT1
  Bottom 0.406: X5.7 5.69,40.13 5.29,40.53 5.29,48.3 R32.3
OUT_VLT2
  Bottom 0.406: X5.8 8.83,42.67 10.39,44.23 10.39,48.28 R32.1 10.25,52 R23.1
OUT_VOLTAGE_SENSE  (via drill 0.6, 0.6 pad 0.25)
  Top 0.254: U2.6 72.99,62.53 73.09,62.43 v73.09,61.63 | R25.2 8.33,68.37 9.19,69.23 36.09,69.23 v36.09,69.33
  Bottom 0.254: SV1.4 82.26,60.43 75.39,60.43 74.69,61.13 73.29,61.13 73.09,61.33 v73.09,61.63 72.89,62.03 64.69,62.03 63.69,63.03 63.69,68.33 62.69,69.33 v36.09,69.33
REF1
  Top 0.254: SV8.2 47.49,29.83 46.39,31.13 46.39,33.83 46.99,34.53 56.09,34.53 57.29,33.63 U1.5
REF2
  Top 0.254: U1.6 61.89,33.63 61.29,33.03 56.89,33.03 55.79,33.93 47.29,33.93 46.99,33.63 46.99,31.63 47.49,31.03 50.39,31.03 51.79,29.73 53.49,29.73 SV9.2
SCL  (via drill 0.6)
  Top 0.254: X1.1 82.26,74.53 78.79,74.53 | 78.79,74.53 78.49,74.23 78.49,65.13 | 78.49,65.13 78.49,59.63 | 78.49,59.63 78.49,54.83 77.69,54.03 U3.10 | R39.2 78.79,74.53 | U2.10 77.89,64.53 78.49,65.13 | U4.10 78.09,59.23 78.49,59.63 | R43.2 R35.2 72.19,49.33 72.49,49.63 v80.29,49.63
  Bottom 0.254: v80.29,49.63 88.99,49.63 89.59,50.23 89.59,72.93 87.99,74.53 82.32,74.53 X1.1
SDA
  Top 0.254: X1.2 79.62,71.96 79.19,71.53 79.19,54.53 78.19,53.53 U3.9 71.49,53.53 71.19,53.83 71.19,58.23 | U4.9 71.69,58.73 71.19,58.23 | R36.2 R40.2 | R40.2 58.09,63.93 58.29,64.13 57.89,64.13 R40.2 | R40.2 59.49,63.93 60.99,65.53 68.59,65.53 69.39,66.23 69.39,67.13 R44.2 71.09,67.33 71.19,67.23 71.19,64.33 71.49,64.03 | 71.19,58.23 71.19,63.73 71.49,64.03 | U2.9 71.49,64.03
VER_REF
  Top 0.254: SV9.3 58.55,32.37 59.19,31.73 R55.2
  Top 0.305: R55.2 C29.1
  Top 0.406: SV8.3 SV9.3

## Text on the board
Name: +5V | GND | +3.3V | SCL | Power Supply Section | SDA | INIS | OUTIS | INVS | OUTVS | DCLS | 1.7V | Tinkerer's Lab, VESIT (2018-19) | ADC Section | AIN11 | AIN10 | AIN9 | AIN8 | AIN7 | OUTV | AIN6 | INV | INA2181 OUT | IN1+ | INI | IN1- | IN2+ | Dept. of Electronics Engg. | AC Voltage And Current Sensing Circuit | V.E.S. Institute of Technology | IN2- | OUTI | AC V & I Sensing Section | LDR Section | DC Link I/P And Ref. Vltg / Generation Section